# Altium PCB EMG_MainBoard_Layout.PcbDoc (part 5 of 6)
Units mm, origin at the board's own origin, x right, y up, seen from the top; angles counter-clockwise.
Board outline 80 x 45 mm, 4 copper layers (L1 TOP, L2 GND, L3 POWER SIGNAL, L4 BOTTOM GND), stack 1.164 mm thick; 231 components, 136 nets, 808 pads, 288 vias.
Unrouted connection lines stored in the file: 570.
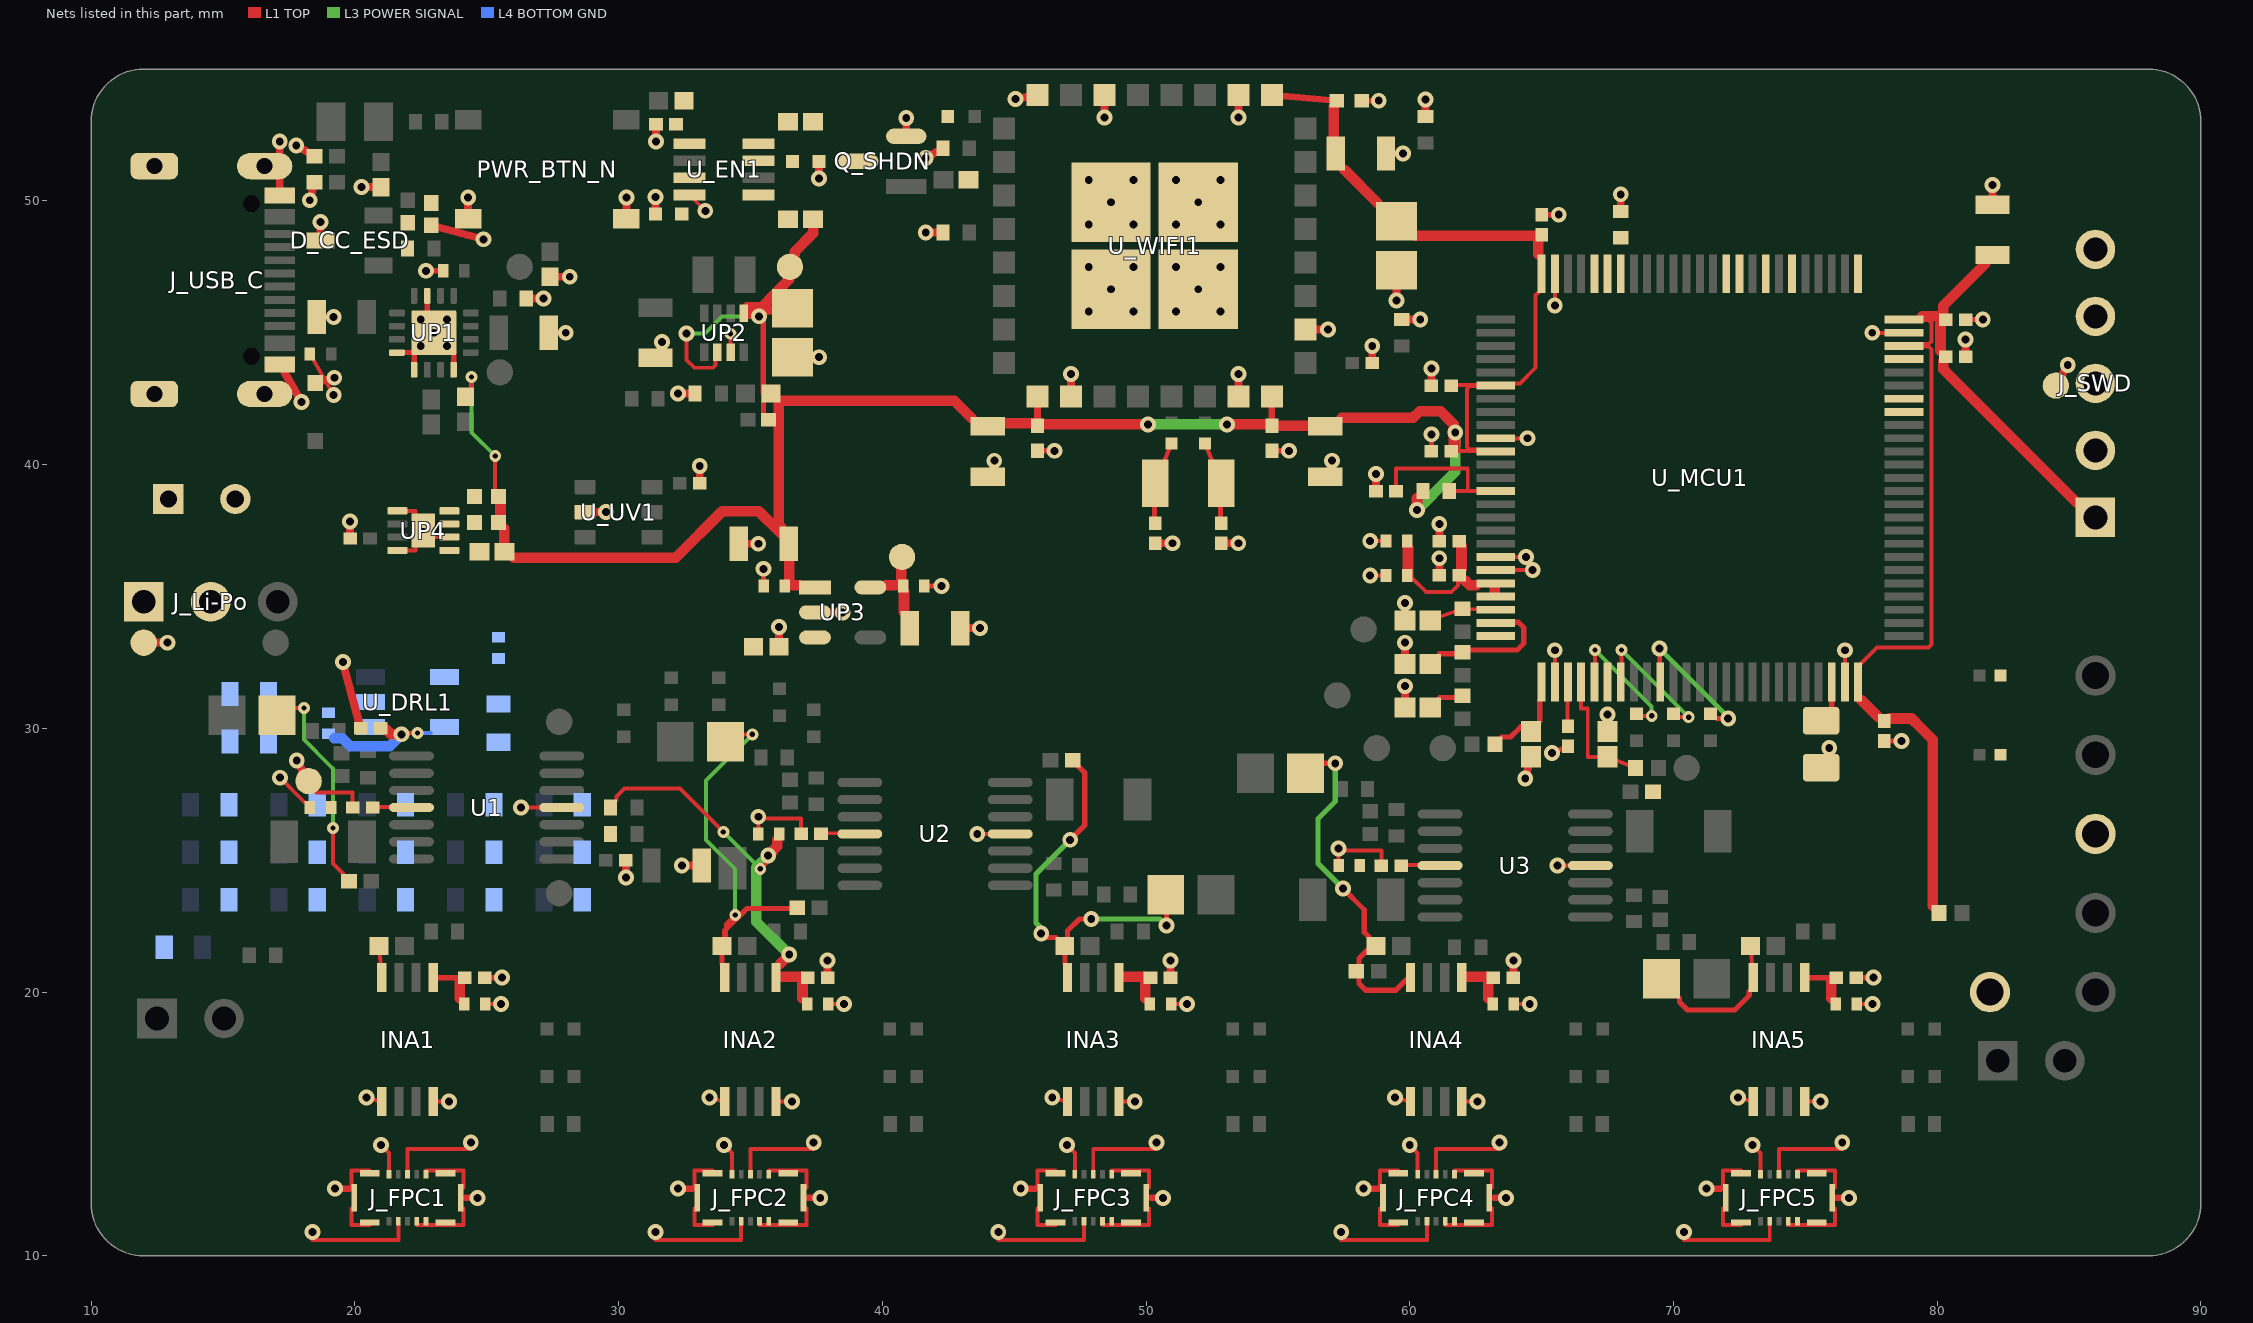
[diagram p5: the nets of this part, all layers, seen from the top]

## Part data (continued)
U2: library part EMG_R5_U2, "None", Case/Package=TSSOP, Input Bias Current=100pA, Input Offset Voltage (Vos)=4.5mV, Max Operating Temperature=125°C, Max Supply Voltage=6V, Min Operating Temperature=-40°C, Min Supply Voltage=1.8V, Nominal Supply Current=45uA, Output Current=15mA, Power Supply Rejection Ratio (PSRR)=63dB, Voltage Gain=110dB, Amplifier Type="GENERAL PURPOSE", Common Mode Rejection Ratio=56dB, Controlled Revision="R5 2026-09-16; project-local frozen symbol/footprint", Gain Bandwidth Product=1MHz, Lead Free="Lead Free", Mount="Surface Mount", Number of Channels=4, Number of Circuits=4, Number of Elements=4, Number of Pins=14, Packaging="Tape and Reel", RoHS Compliant=Yes, Slew Rate=0.5V/µs, Supply Current=45uA, Technology=CMOS, Unity Gain Bandwidth Product=1MHz
U3: library part EMG_R5_U3, "None", Case/Package=TSSOP, Input Bias Current=100pA, Input Offset Voltage (Vos)=4.5mV, Max Operating Temperature=125°C, Max Supply Voltage=6V, Min Operating Temperature=-40°C, Min Supply Voltage=1.8V, Nominal Supply Current=45uA, Output Current=15mA, Power Supply Rejection Ratio (PSRR)=63dB, Voltage Gain=110dB, Amplifier Type="GENERAL PURPOSE", Common Mode Rejection Ratio=56dB, Controlled Revision="R5 2026-09-16; project-local frozen symbol/footprint", Gain Bandwidth Product=1MHz, Lead Free="Lead Free", Mount="Surface Mount", Number of Channels=4, Number of Circuits=4, Number of Elements=4, Number of Pins=14, Packaging="Tape and Reel", RoHS Compliant=Yes, Slew Rate=0.5V/µs, Supply Current=45uA, Technology=CMOS, Unity Gain Bandwidth Product=1MHz
U_DRL1: library part EMG_MCP6401_SOT23_5_DRL, "MCP6401 single operational amplifier, SOT-23-5; optional DRL, DNP", Manufacturer="Microchip Technology", Package="SOT-23-5 / OT", Assembly Variant="PROTO_1_REMOTE_NTC: Not Fitted", Manufacturer Part Number=MCP6401T-E/OT, Population="DNP - optional DRL"
U_EN1: library part EMG_R5_U_EN1, "Pushbutton On / Off  Controller with µP Interrupt, 8-pin SOT23 (TS8-8), -40 to 85 degC, Pb-Free, Mini Tape and Reel", Manufacturer="Linear Technology", Code_JEDEC=MO-193, ComponentLink1Description="Manufacturer URL", ComponentLink1URL=http://www.linear.com/, ComponentLink2Description=Datasheet, ComponentLink2URL=http://cds.linear.com/docs/en/datasheet/2954fb.pdf, ComponentLink3Description="Package Specification", ComponentLink3URL=http://cds.linear.com/docs/en/packaging/SOT_8_05-08-1637.pdf, Controlled Revision="R5 2026-09-16; project-local frozen symbol/footprint", DatasheetVersion="Rev. B", Mounting Technology="Surface Mount", Number of Supplies(#)=1, PackageDescription="8-Pin Plastic TSOT-23, Body 2.9 x 1.63 mm, Pitch 0.65 mm", PackageReference=TS8-8, PackageVersion="Rev. A, 08/2010", Packing="Mini Tape and Reel", PartNumber=LTC2954ITS8-1#TRMPBF, RoHS=TRUE
U_MCU1: library part EMG_R5_U_MCU1, "Integrated Circuit", Manufacturer_Name=STMicroelectronics, Mouser Part Number=511-STM32U575VIT6, Arrow Part Number=STM32U575VIT6, Arrow Price/Stock=https://www.arrow.com/en/products/stm32u575vit6/stmicroelectronics.html?utm_currency=USD&region=nac, Controlled Revision="R5 2026-09-16; project-local frozen symbol/footprint", Datasheet Link=https://www.st.com/resource/en/datasheet/stm32u575ag.pdf, Height=1.6mm, Manufacturer_Part_Number=STM32U575VIT6, Mouser Price/Stock=https://www.mouser.co.uk/ProductDetail/STMicroelectronics/STM32U575VIT6?qs=DRkmTr78QAR9I8TWG1L7Og%3D%3D
U_UV1: library part EMG_R5_U_UV1, "Low Quiescent Current, Programmable-Delay Supervisory Circuit, 1 Supply Monitored, -40 to 125 degC, 6-pin SOT-23 (DBV), Green (RoHS & no Sb/Br)", Manufacturer="Texas Instruments", Rating=Catalog, Threshold Voltage 1 (typ)(Typ)(V)=3.07, # of Supplies Monitored=1, Code_JEDEC=MO-178-AB*, ComponentLink1Description=Datasheet, ComponentLink1URL=http://www.ti.com/general/docs/lit/getliterature.tsp?genericPartNumber=TPS3808G33&fileType=pdf, Controlled Revision="R5 2026-09-16; project-local frozen symbol/footprint", DatasheetVersion=SBVS050J, Iq(Typ)(uA)=2.4, Mounting Technology="Surface Mount", Output Driver Type / Reset Output="Active-low, Open-drain", PackageDescription="6-Pin Plastic Small-Outline Package, 2.9 x 1.6 mm Body, 0.95 mm Pitch, 2.8 mm Lead Span", PackageReference=DBV0006A, PackageVersion="revK, Mar-2006", PartNumber=TPS3808G33DBVR, Reset Threshold Accuracy(%)=0.5, SubFamily="Supervisor and Reset IC", Time Delay(ms)=Programmable, VCC(Max)(V)=6.5, VCC(Min)(V)=1.7
U_WIFI1: library part EMG_R5_U_WIFI1, "Integrated Circuit", Manufacturer_Name=STMicroelectronics, Arrow Part Number=ST67W611M1A6BTR, Arrow Price/Stock=https://www.arrow.com/en/products/st67w611m1a6btr/stmicroelectronics.html?utm_currency=USD&region=nac, Controlled Revision="R5 2026-09-16; project-local frozen symbol/footprint", Datasheet Link=https://www.st.com/resource/en/datasheet/st67w611m1.pdf, Height=2.37mm, Manufacturer_Part_Number=ST67W611M1A6BTR
UP1: library part EMG_R5_UP1, "BQ24072T single-cell Li-ion charger with dynamic power path; OUT tracks battery +225mV with 3.4V minimum regulation under USB power", Manufacturer="Texas Instruments", Over Voltage Protection=N, Code_JEDEC=MO-220, ComponentLink1Description=Datasheet, ComponentLink1URL=http://www.ti.com/general/docs/lit/getliterature.tsp?genericPartNumber=BQ24072T&fileType=pdf, Controlled Revision="R5 2026-09-16; project-local frozen symbol/footprint", DatasheetVersion=SLUS937A, Eco-Plan="Green (RoHS & no Sb/Br)", Lead Acid=N, Li-Ion=Y, Li-Polymer=Y, Manufacturer Part Number=BQ24072TRGTR, Mounting Technology="Surface Mount", NiCd=N, NiMH=N, PackageDescription="16-Pin Plastic Quad Flat No-Lead, 3 x 3 mm Body, 0.5 mm Pitch, 1.7 x 1.7 mm Exposed Pad", PackageReference=RGT0016C, PackageVersion="revH, Oct-2011", PartNumber=BQ24072TRGTR, SubFamily="Battery Charge Management", Vin(Min)(V)=4.3
UP2: library part EMG_R5_UP2, "1.5-A output current, high-power-density buck-boost converter", Package="SOT-583 Texas Instruments", Check_prices=https://www.snapeda.com/parts/TPS631000DRLR/Texas+Instruments/view-part/?ref=eda, Controlled Revision="R5 2026-09-16; project-local frozen symbol/footprint", MF="Texas Instruments", MP=TPS631000DRLR, SnapEDA_Link=https://www.snapeda.com/parts/TPS631000DRLR/Texas+Instruments/view-part/?ref=snap
UP3: library part EMG_R5_UP3, "IC REG LINEAR 3V 300MA SOT23-5", Controlled Revision="R5 2026-09-16; project-local frozen symbol/footprint", RoHS Compliant=Yes
UP4: library part EMG_R5_UP4, "3ÂµA 1-Cell/2-Cell Fuel Gauge with ModelGauge", Package="TDFN-8 Maxim", Availability="In Stock", Check_prices=https://www.snapeda.com/parts/MAX17048G+T10/Analog+Devices/view-part/?ref=eda, Controlled Revision="R5 2026-09-16; project-local frozen symbol/footprint", MF="Analog Devices", MP=MAX17048G+T10, Price=None, Purchase-URL=https://pricing.snapeda.com/search/part/MAX17048G+T10/?ref=eda, SnapEDA_Link=https://www.snapeda.com/parts/MAX17048G+T10/Analog+Devices/view-part/?ref=snap
X_WIFI_32K: library part EMG_R5_X_WIFI_32K, "Epson FC-135 32.768 kHz 9 pF +/-20 ppm, ESR 70 kohm max, 3.2x1.5 mm, 2 terminals", Frequency="32.768 kHz", Load Capacitance="9 pF", Manufacturer="Seiko Epson Corporation", Package="SMD3215 / 3.2 x 1.5 mm / 2 terminal", Temperature Range="-40 to +85 degC", Tolerance="+/-20 ppm at 25 degC, 0.1 uW", Controlled Revision="R5 2026-09-16; project-local frozen symbol/footprint", Datasheet Link=https://download.epsondevice.com/td/pdf/td_xtal_32khz/FC-135_Q13FC13500003_en.pdf, Drive Level="0.1 uW nominal; 0.5 uW maximum", ESR="70 kohm maximum", Height="0.8 +/-0.1 mm", Manufacturer Part Number=Q13FC13500003, Packaging Note="Q13FC13500003xx; xx=00 is 3000/reel"

## Free pads (board coordinates)
  round 1 smd paste-0.5 mask+0.05: TP_3V0_ANA(40.75,36.5) TP_3V3_DIG(36.5,47.5) TP_GND_ANA(18.25,28) TP_GND_DIG(84.5,43) TP_GND_PWR(12,33.25) TP_VBAT_CELL(17,33.25) TP_VBUS(26.25,47.5) TP_VOUT_1(58.25,33.75) TP_VOUT_2(61.25,29.25) TP_VOUT_3(58.75,29.25) TP_VOUT_4(57.25,31.25) TP_VOUT_5(70.5,28.5) TP_VREF_A(27.75,23.75) TP_VREF_B_SRC(27.75,30.25) TP_VSYS(25.5,43.5)

## Via types
v1: diameter 0.6, hole 0.3, L1 TOP to L4 BOTTOM GND, 240 vias
v2: diameter 0.45, hole 0.2, L1 TOP to L4 BOTTOM GND, 31 vias
v3: diameter 0.6, hole 0.3, L1 TOP to L4 BOTTOM GND, tented both sides, 12 vias
v4: diameter 0.5, hole 0.3, L1 TOP to L4 BOTTOM GND, 5 vias

## Nets (pads, with @x,y where several pads share a name; then routed paths per layer and width w, separated by ;. In a path a pad name is that pad's centre, name@x,y a point inside that pad or via, vN(x,y) a via of type N, cw(c..) or ccw(c..) an arc to the next point about the centre after c; other vN are vias at no path point)
3V0_ANA: C1_MCU.1 C2_MCU.2 C3_MCU.1 C4_MCU.2 C_DRL_DEC.1 CCU1.1 CCU2.2 CCU3.2 CCU4.1 CCU5.2 CCU6.1 CCU7.2 CCU8.1 CCU9.2 CCU10.1 Cdiv.2 CU_11.2 CU_12.2 CU_14.2 CU_21.1 CU_22.1 CU_24.1 CUP5_2.2 CUP5_3.2 INA1.5 INA2.5 INA3.5 INA4.5 INA5.5 J_FPC1.P1_1 J_FPC1.P1_2 J_FPC1.P1_3 J_FPC2.P1_1 J_FPC2.P1_2 J_FPC2.P1_3 J_FPC3.P1_1 J_FPC3.P1_2 J_FPC3.P1_3 J_FPC4.P1_1 J_FPC4.P1_2 J_FPC4.P1_3 J_FPC5.P1_1 J_FPC5.P1_2 J_FPC5.P1_3 pad.TP_3V0_ANA RV2.1 U1.4 U2.4 U3.4 U_DRL1.5 U_MCU1.21 U_MCU1.22 UP3.5 | length 53.2
  L1 TOP w0.15: J_FPC1.P1_2@19.88,11.8 19.88,11.17 J_FPC1.P1_3@20.565,11.17 ; J_FPC1.P1_2@19.88,12.6 19.88,13.23 J_FPC1.P1_1@20.565,13.23 ; CU_11.2@20.875,27.025 U1.4@21.325,27.025 ; Cdiv.2@21.175,29.825 v2(22.375,29.825) ; RV2.1@29.925,27.275 29.925,27.425 30.225,27.725 32.325,27.725 v2(33.975,26.075) ; J_FPC2.P1_2@32.88,11.8 32.88,11.17 J_FPC2.P1_3@33.565,11.17 ; J_FPC2.P1_2@32.88,12.6 32.88,13.23 J_FPC2.P1_1@33.565,13.23 ; v2(35.375,24.675) 35.975,25.275 CU_22.1@35.975,25.775 ; CU_12.2@37.875,26.025 U2.4@38.325,26.025 ; J_FPC3.P1_2@45.88,11.8 45.88,11.17 J_FPC3.P1_3@46.565,11.17 ; J_FPC3.P1_2@45.88,12.6 45.88,13.23 J_FPC3.P1_1@46.565,13.23 ; J_FPC4.P1_2@58.88,11.8 58.88,11.17 J_FPC4.P1_3@59.565,11.17 ; J_FPC4.P1_2@58.88,12.6 58.88,13.23 J_FPC4.P1_1@59.565,13.23 ; CU_14.2@59.875,24.825 U3.4@60.325,24.825 ; C2_MCU.2@60.075,36.875 60.075,35.725 60.625,35.175 61.524,35.175 61.575,35.175 61.825,35.425 C1_MCU.1@61.825,36.925 ; J_FPC5.P1_2@71.88,11.8 71.88,11.17 J_FPC5.P1_3@72.565,11.17 ; J_FPC5.P1_2@71.88,12.6 71.88,13.23 J_FPC5.P1_1@72.565,13.23
  L1 TOP w0.2: INA1.5@22.975,20.55 CCU1.1@24.171,20.55 ; INA5.5@74.975,20.55 CCU10.1@76.171,20.55
  L1 TOP w0.25: v1(19.25,12.55) 19.8,12.55 ; v1(32.25,12.55) 32.8,12.55 ; v1(45.25,12.55) 45.8,12.55 ; v1(58.25,12.55) 58.8,12.55 ; v1(71.25,12.55) 71.8,12.55
  L1 TOP w0.4: Cdiv.2@21.175,29.975 21.375,29.775 v1(21.775,29.775) ; CCU2.2@23.975,19.775 CCU1.1@23.975,20.375 ; v1(35.675,25.175) 36.025,25.525 CU_22.1@36.025,25.775 ; INA2.5@36.125,20.575 CCU4.1@36.925,20.575 ; INA2.5@36.125,21.075 v1(36.475,21.425) ; CCU3.2@36.975,19.775 CCU4.1@36.975,20.375 ; UP3.5@40.125,35.425 CUP5_2.2@40.625,35.425 ; CUP5_2.2@40.725,35.625 pad.TP_3V0_ANA@40.725,36.025 ; CUP5_3.2@40.825,34.425 CUP5_2.2@40.825,35.175 ; INA3.5@49.125,20.575 CCU6.1@49.925,20.575 ; CCU5.2@49.975,19.775 CCU6.1@49.975,20.375 ; C4_MCU.2@59.925,36.025 C2_MCU.2@59.925,36.875 ; C3_MCU.1@61.975,36.025 C1_MCU.1@61.975,36.925 ; C3_MCU.1@62.075,35.625 62.275,35.425 U_MCU1.21@62.525,35.425 ; INA4.5@62.125,20.575 CCU8.1@62.925,20.575 ; CCU7.2@62.975,19.775 CCU8.1@62.975,20.375 ; U_MCU1.22@63.225,35.125 U_MCU1.21@63.225,35.375 ; CCU9.2@75.975,19.775 CCU10.1@75.975,20.375
  L3 POWER SIGNAL w0.15: v2(33.975,26.075) v2(35.375,24.675)
  L3 POWER SIGNAL w0.4: v1(35.675,25.175) 35.225,24.725 35.225,22.675 v1(36.475,21.425)
  L4 BOTTOM GND w0.15: v2(22.375,29.825) U_DRL1.5@22.875,29.825
  L4 BOTTOM GND w0.4: C_DRL_DEC.1@19.225,29.625 19.525,29.625 19.825,29.325 20.25,29.325 21.325,29.325 v1(21.775,29.775)
3V3_DIG: C_MCU_BULK.1 C_MCU_VDD1.2 C_MCU_VDD2.2 C_MCU_VDD3.2 C_MCU_VDD4.1 C_MCU_VDD5.1 C_VBAT.2 C_VDDUSB.1 C_WIFI_BULK.2 C_WIFI_VDD33.1 C_WIFI_VDD33_HF.1 C_WIFI_VDDIO1.2 C_WIFI_VDDIO1_HF.1 C_WIFI_VDDIO2.2 C_WIFI_VDDIO2_HF.2 CUP4.1 CUP4_FB.2 CUP5_1.1 CUP5_5.1 J_SWD.1 pad.TP_3V3_DIG R_AL.2 R_INT_PULLUP.1 R_KILL_PU.2 R_NRST.2 R_PGOOD.2 R_SCL.2 R_SDA.2 R_WIFI_BOOT_OVR.1 RUP_3.2 U_MCU1.6 U_MCU1.11 U_MCU1.28 U_MCU1.50 U_MCU1.73 U_MCU1.75 U_MCU1.100 U_WIFI1.9 U_WIFI1.16 U_WIFI1.25 UP2.1 UP2.6 UP3.1 | length 131.4
  L1 TOP w0.15: R_PGOOD.2@24.425,42.925 v2(24.425,43.325) ; R_SDA.2@25.325,39.075 v2(25.325,40.325) ; v1(32.575,44.975) 32.575,43.975 32.875,43.675 33.575,43.675 33.675,43.775 UP2.6@33.675,43.975 ; UP2.1@34.875,45.625 v1(35.325,45.625) ; C_MCU_VDD1.2@61.775,40.525 U_MCU1.11@62.525,40.525 ; C_VBAT.2@61.775,43.025 U_MCU1.6@62.525,43.025 ; U_MCU1.11@62.525,40.575 62.275,40.575 62.175,40.675 62.175,42.875 62.275,42.975 U_MCU1.6@62.525,42.975 ; U_MCU1.6@63.975,43.075 64.175,43.075 64.775,43.675 64.775,46.425 U_MCU1.100@64.875,46.525 ; C_MCU_VDD2.2@65.975,30.325 U_MCU1.28@65.975,31.075 ; U_MCU1.50@77.125,32.475 77.725,33.075 79.675,33.075 79.775,33.175 79.775,44.375 79.675,44.475 U_MCU1.73@79.425,44.475 ; U_MCU1.73@79.425,44.575 79.675,44.575 79.775,44.675 79.775,45.375 79.675,45.475 U_MCU1.75@79.425,45.475
  L1 TOP w0.2: CUP4_FB.2@35.69,41.7 35.495,41.7 35.495,45.926 CUP4.1@36.6,45.926 35.489,45.926 35.489,42.7 RUP_3.2@35.779,42.7
  L1 TOP w0.25: C_WIFI_VDDIO1_HF.1@45.885,41.475 U_WIFI1.9@45.885,42.584 ; C_WIFI_VDD33_HF.1@54.775,41.475 U_WIFI1.16@54.775,42.584 ; U_WIFI1.25@54.775,54.016 C_WIFI_VDDIO2_HF.2@57.225,53.8
  L1 TOP w0.3: UP2.1@34.75,45.735 CUP4.1@36.6,45.926
  L1 TOP w0.4: R_SCL.2@25.525,38.075 R_SDA.2@25.525,38.575 ; R_AL.2@25.675,37.025 R_SCL.2@25.675,37.575 ; R_AL.2@26.025,36.475 32.175,36.475 33.925,38.225 35.325,38.225 CUP5_5.1@36.125,37.425 ; UP2.1@34.875,45.975 35.425,45.975 35.91,46.46 pad.TP_3V3_DIG@36.475,47.025 ; CUP5_5.1@36.175,37.625 36.075,37.725 36.075,42.425 42.725,42.425 C_WIFI_VDDIO1.2@43.375,41.775 ; CUP5_1.1@36.475,35.425 UP3.1@36.875,35.425 ; CUP5_1.1@36.475,35.625 CUP5_5.1@36.475,36.375 ; 36.675,47.975 36.675,48.075 37.375,48.775 R_INT_PULLUP.1@37.375,49.025 ; C_WIFI_VDDIO1.2@44.625,41.575 C_WIFI_VDDIO1_HF.1@45.675,41.575 ; C_WIFI_VDDIO1_HF.1@46.075,41.525 v1(50.075,41.525) ; v1(53.075,41.525) 54.525,41.525 ; C_WIFI_VDD33_HF.1@54.975,41.475 C_WIFI_VDD33.1@56.175,41.475 ; C_WIFI_VDDIO2.2@57.125,52.425 C_WIFI_VDDIO2_HF.2@57.125,53.575 ; C_WIFI_VDD33.1@57.425,41.775 60.125,41.775 60.375,42.025 61.175,42.025 61.524,41.675 61.675,41.525 C_MCU_VDD1.2@61.675,40.725 ; C_WIFI_VDDIO2.2@57.525,51.175 C_WIFI_BULK.2@58.775,49.925 ; C_WIFI_BULK.2@60.225,48.675 61.524,48.675 C_MCU_VDD5.1@64.775,48.675 ; v1(60.275,38.275) R_NRST.2@60.275,38.725 ; C_MCU_VDD1.2@61.725,40.725 v1(61.725,41.225) ; U_MCU1.100@64.875,47.975 C_MCU_VDD5.1@64.875,48.525 ; U_MCU1.50@77.125,31.075 C_MCU_VDD3.2@77.775,30.425 ; C_MCU_VDD3.2@78.175,30.375 79.025,30.375 79.376,30.024 79.825,29.575 R_WIFI_BOOT_OVR.1@79.825,23.275 ; U_MCU1.75@79.425,45.625 C_MCU_VDD4.1@80.075,45.625 ; C_VDDUSB.1@80.125,44.325 C_MCU_VDD4.1@80.125,45.325 ; C_VDDUSB.1@80.225,43.925 80.225,43.625 80.476,43.375 J_SWD.1@85.275,38.575 ; C_MCU_VDD4.1@80.225,45.725 80.225,46.025 80.476,46.276 C_MCU_BULK.1@81.825,47.625
  L3 POWER SIGNAL w0.15: v2(24.425,43.325) 24.425,42.3 24.425,41.225 v2(25.325,40.325) ; v1(32.575,44.975) 33.275,44.975 33.925,45.625 v1(35.325,45.625)
  L3 POWER SIGNAL w0.4: v1(50.075,41.525) v1(53.075,41.525) ; v1(60.275,38.275) 61.524,39.525 61.725,39.725 v1(61.725,41.225)
ADC_EMG1: C_ADC1.1 R_ADC1.2 U_MCU1.23 | length 2.6
  L1 TOP w0.15: C_ADC1.1@60.777,34.1 R_ADC1.2@62,34.535 U_MCU1.23@63.262,34.5
ADC_EMG2: C_ADC2.1 R_ADC2.2 U_MCU1.24 | length 3.8
  L1 TOP w0.2: C_ADC2.1@61.125,32.825 61.524,32.825 R_ADC2.2@61.725,32.825 ; R_ADC2.2@62.275,32.975 64.075,32.975 64.325,33.225 64.325,33.825 64.125,34.025 U_MCU1.24@63.975,34.025
ADC_EMG3: C_ADC3.1 R_ADC3.2 U_MCU1.25 | length 0.6
  L1 TOP w0.2: C_ADC3.1@61.125,31.175 61.524,31.175 R_ADC3.2@61.725,31.175
ADC_EMG4: C_ADC4.1 R_ADC4.2 U_MCU1.26 | length 1.7
  L1 TOP w0.2: R_ADC4.2@63.475,29.675 63.825,29.675 64.174,30.024 C_ADC4.1@64.225,30.075 ; C_ADC4.1@64.925,30.275 U_MCU1.26@64.925,31.075
ADC_EMG5: C_ADC5.1 R_ADC5.2 U_MCU1.29 | length 6.1
  L1 TOP w0.15: U_MCU1.29@66.5,31.762 66.5,30.75 66.75,30.75 66.75,28.923 C_ADC5.1@67.5,28.923 ; C_ADC5.1@67.5,28.923 R_ADC5.2@68.565,28.5 C_ADC5.1@67.5,28.923
AFE_EN: R_EN_PD.1 U_MCU1.85 UP3.3
BAT_TEMP: J_Li-Po.2 R_TH_BAT.2 R_TS_BOTTOM.2 R_TS_SER.1 R_TS_TOP.1
DRL_AMP_OUT: C_DRL_FB.2 R_DRL_FB.2 R_DRL_OUT1.1 U_DRL1.1
DRL_LIMIT_MID: R_DRL_OUT1.2 R_DRL_OUT2.1
DRL_LIMITED: R_DRL_OUT2.2 R_DRL_SEL.1
DRL_SUM: C_DRL_FB.1 R_DRL_FB.1 R_DRL_VA1.2 R_DRL_VA2.2 R_DRL_VA3.2 R_DRL_VA4.2 R_DRL_VA5.2 R_DRL_VB1.2 R_DRL_VB2.2 R_DRL_VB3.2 R_DRL_VB4.2 R_DRL_VB5.2 R_DRL_VC1.2 R_DRL_VC2.2 R_DRL_VC3.2 R_DRL_VC4.2 R_DRL_VC5.2 U_DRL1.4
FG_ALRT: R_AL.1 U_MCU1.81 UP4.5
GND: C1_EN1.1 C1_MCU.2 C2_EN1.2 C2_MCU.1 C3_EN1.1 C3_MCU.2 C4_MCU.1 C_ADC1.2 C_ADC2.2 C_ADC3.2 C_ADC4.2 C_ADC5.2 C_BAT.2 C_DRL_DEC.2 C_IN_.2 C_MCU_BULK.2 C_MCU_VDD1.1 C_MCU_VDD2.1 C_MCU_VDD3.1 C_MCU_VDD4.2 C_MCU_VDD5.2 C_NRST.2 C_OUT_.2 C_UV_BYPASS.2 C_VBAT.1 C_VBUS.1 C_VDDUSB.2 C_WIFI_BULK.1 C_WIFI_EN.2 C_WIFI_VDD33.2 C_WIFI_VDD33_HF.2 C_WIFI_VDDIO1.1 C_WIFI_VDDIO1_HF.2 C_WIFI_VDDIO2.1 C_WIFI_VDDIO2_HF.1 C_WIFI_X32_IN.1 C_WIFI_X32_OUT.1 CCU1.2 CCU2.1 CCU3.1 CCU4.2 CCU5.1 CCU6.2 CCU7.1 CCU8.2 CCU9.1 CCU10.2 Cdiv.1 Cdiv_1.1 Cdiv_10uF.1 CU6_1.1 CU_11.1 CU_12.1 CU_14.1 CU_21.2 CU_22.2 CU_24.2 CUP4.2 CUP4_1.2 CUP5_1.2 CUP5_2.1 CUP5_3.1 CUP5_5.2 D_CC_ESD.3 D_VBUS.2 INA1.1 INA1.4 INA2.1 INA2.4 INA3.1 INA3.4 INA4.1 INA4.4 INA5.1 INA5.4 J_FPC1.1 J_FPC1.3 J_FPC1.5 J_FPC1.7 J_FPC1.9 J_FPC1.10 J_FPC1.P2_1 J_FPC1.P2_2 J_FPC1.P2_3 J_FPC2.1 J_FPC2.3 J_FPC2.5 J_FPC2.7 J_FPC2.9 J_FPC2.10 J_FPC2.P2_1 J_FPC2.P2_2 J_FPC2.P2_3 J_FPC3.1 J_FPC3.3 J_FPC3.5 J_FPC3.7 J_FPC3.9 J_FPC3.10 J_FPC3.P2_1 J_FPC3.P2_2 J_FPC3.P2_3 J_FPC4.1 J_FPC4.3 J_FPC4.5 J_FPC4.7 J_FPC4.9 J_FPC4.10 J_FPC4.P2_1 J_FPC4.P2_2 J_FPC4.P2_3 J_FPC5.1 J_FPC5.3 J_FPC5.5 J_FPC5.7 J_FPC5.9 J_FPC5.10 J_FPC5.P2_1 J_FPC5.P2_2 J_FPC5.P2_3 J_Li-Po.1 J_SWD.3 J_USB_C.A1_B12 J_USB_C.B1_A12 J_USB_C.SH1 J_USB_C.SH2 J_USB_C.SH3 J_USB_C.SH4 MCU_VCAP.1 pad.TP_GND_ANA pad.TP_GND_DIG pad.TP_GND_PWR PWR_BTN_N.C PWR_BTN_N.D Q_SHDN.2 R_EN_PD.2 R_LIM.1 R_MCU_BOOT0_PD.1 R_SHDN_PD.1 R_TH_BAT.1 R_TMR.1 R_TS_BOTTOM.1 R_WIFI_BOOT_PD.1 R_WIFI_CS_PD.2 R_WIFI_EN_PD.2 RISET.2 RJ1.1 RJ2.1 RUP_4.1 RV1.2 TP_GND.TP U1.11 U2.11 U3.11 U_DRL1.2 U_EN1.4 U_MCU1.10 U_MCU1.19 U_MCU1.20 U_MCU1.27 U_MCU1.49 U_MCU1.74 U_MCU1.99 U_UV1.2 U_WIFI1.10 U_WIFI1.15 U_WIFI1.18 U_WIFI1.26 U_WIFI1.30 U_WIFI1.32 U_WIFI1.33 U_WIFI1.34 U_WIFI1.35 U_WIFI1.36 UP1.4 UP1.5 UP1.8 UP1.15 UP1.17@23,45 UP2.7 UP3.2 UP4.1 UP4.4 UP4.6 UP4.9 | length 141.9
  L1 TOP w0.15: v1(17.169,28.131) 18.1,27.2 ; v1(18.4,10.9) 18.4,10.6 21.65,10.6 J_FPC1.7@21.65,11.17 ; C_VBUS.1@18.444,43.95 v1(19.2,42.641) ; 18.55,27.576 19.921,27.576 CU_11.1@19.921,27 ; v1(20.445,16.005) 20.85,15.897 ; v1(21,14.2) 21.3,13.9 J_FPC1.1@21.3,13.23 ; UP4.4@21.615,36.75 22.3,36.75 UP4.9@22.3,36.97 ; UP4.1@21.615,38.25 22.3,38.25 UP4.9@22.3,38.03 ; J_FPC1.3@22,13.23 22,14.05 24.4,14.05 v1(24.4,14.3) ; J_FPC1.9@22.35,11.17 23.435,11.17 24.12,11.17 J_FPC1.P2_2@24.12,11.8 ; J_FPC1.5@22.7,13.23 23.435,13.23 24.12,13.23 J_FPC1.P2_2@24.12,12.6 ; UP4.9@22.9,37.25 UP4.6@23.585,37.25 ; 23.15,15.85 v1(23.575,15.85) ; 25.15,19.55 v1(25.55,19.55) ; v1(26.3,27) 27,27 ; v1(31.4,10.9) 31.4,10.6 34.65,10.6 J_FPC2.7@34.65,11.17 ; U_EN1.4@32.89,50.025 v1(33.291,49.624) ; v1(33.445,16.005) 33.85,15.897 ; v1(34,14.2) 34.3,13.9 J_FPC2.1@34.3,13.23 ; 34.25,44.595 v2(34.25,44.965) ; J_FPC2.3@35,13.23 35,14.05 37.4,14.05 v1(37.4,14.3) ; CU_22.2@35.3,26 35.3,26.576 36.921,26.576 CU_12.1@36.921,26 ; 35.3,26.25 v1(35.3,26.65) ; J_FPC2.9@35.35,11.17 36.435,11.17 37.12,11.17 J_FPC2.P2_2@37.12,11.8 ; J_FPC2.5@35.7,13.23 36.435,13.23 37.12,13.23 J_FPC2.P2_2@37.12,12.6 ; 36.15,15.85 v1(36.575,15.85) ; 38.15,19.55 v1(38.55,19.55) ; v1(43.6,26) U2.11@44,26 ; v1(44.4,10.9) 44.4,10.6 47.65,10.6 J_FPC3.7@47.65,11.17 ; v1(46.445,16.005) 46.85,15.897 ; v1(47,14.2) 47.3,13.9 J_FPC3.1@47.3,13.23 ; J_FPC3.3@48,13.23 48,14.05 50.4,14.05 v1(50.4,14.3) ; J_FPC3.9@48.35,11.17 49.435,11.17 50.12,11.17 J_FPC3.P2_2@50.12,11.8 ; J_FPC3.5@48.7,13.23 49.435,13.23 50.12,13.23 J_FPC3.P2_2@50.12,12.6 ; 49.15,15.85 v1(49.575,15.85) ; 51.15,19.55 v1(51.55,19.55) ; CU_24.2@57.3,24.8 57.3,25.376 58.921,25.376 CU_14.1@58.921,24.8 ; 57.3,25.05 v1(57.3,25.45) ; v1(57.4,10.9) 57.4,10.6 60.65,10.6 J_FPC4.7@60.65,11.17 ; v1(58.5,35.8) 58.9,35.8 ; v1(58.5,37.1) 58.9,37.1 ; v1(59.445,16.005) 59.85,15.897 ; v1(60,14.2) 60.3,13.9 J_FPC4.1@60.3,13.23 ; J_FPC4.3@61,13.23 61,14.05 63.4,14.05 v1(63.4,14.3) ; J_FPC4.9@61.35,11.17 62.435,11.17 63.12,11.17 J_FPC4.P2_2@63.12,11.8 ; J_FPC4.5@61.7,13.23 62.435,13.23 63.12,13.23 J_FPC4.P2_2@63.12,12.6 ; 62.15,15.85 v1(62.575,15.85) ; 64,36 v1(64.662,36) ; 64,36.5 v1(64.412,36.5) ; 64,41 v1(64.462,41) ; 64.15,19.55 v1(64.55,19.55) ; 65.5,32.5 v1(65.5,32.962) ; v1(65.5,46.038) 65.5,46.5 ; v1(65.6,24.8) U3.11@66,24.8 ; v1(70.4,10.9) 70.4,10.6 73.65,10.6 J_FPC5.7@73.65,11.17 ; v1(72.445,16.005) 72.85,15.897 ; v1(73,14.2) 73.3,13.9 J_FPC5.1@73.3,13.23 ; J_FPC5.3@74,13.23 74,14.05 76.4,14.05 v1(76.4,14.3) ; J_FPC5.9@74.35,11.17 75.435,11.17 76.12,11.17 J_FPC5.P2_2@76.12,11.8 ; J_FPC5.5@74.7,13.23 75.435,13.23 76.12,13.23 J_FPC5.P2_2@76.12,12.6 ; 75.15,15.85 v1(75.575,15.85) ; 76.5,32.5 v1(76.5,32.962) ; 77.15,19.55 v1(77.55,19.55) ; v1(77.538,45) 78,45
  L1 TOP w0.2: C_BAT.2@18.55,45.6 v1(19.2,45.6) ; UP1.4@21.6,44.25 22.3,44.25 UP1.17@22.3,44.27 ; UP1.5@22.25,43.6 22.25,44.3 UP1.17@22.27,44.3 ; v3(22.7,47.35) C_IN_.2@23.35,47.35 ; UP1.17@22.75,45.7 UP1.15@22.75,46.4 ; UP1.17@23.73,44.3 23.75,44.3 UP1.8@23.75,43.6 ; CCU1.2@24.929,20.55 v3(25.579,20.55) ; C_OUT_.2@27.35,45 v1(28,45) ; CUP4_1.2@31.4,44.05 v1(31.649,44.651) ; CUP5_1.2@35.5,35.4 v1(35.5,36.05) ; CUP4.2@36.6,44.074 v1(37.6,44.074) ; CUP5_2.1@41.6,35.4 v3(42.25,35.4) ; C_WIFI_VDDIO1.1@44,39.55 v1(44.249,40.151) ; C_WIFI_VDDIO1_HF.2@45.885,40.525 v3(46.535,40.525) ; C_WIFI_VDD33_HF.2@54.775,40.525 v3(55.425,40.525) ; C_WIFI_VDD33.2@56.8,39.55 v1(57.049,40.151) ; C_WIFI_VDDIO2_HF.1@58.175,53.8 v3(58.825,53.8) ; C_WIFI_VDDIO2.1@59.1,51.8 v1(59.75,51.8) ; C_ADC1.2@59.823,34.1 v1(59.823,34.75) ; C_MCU_VDD1.1@60.821,40.5 v3(60.821,41.15) ; C_MCU_VDD5.2@65,49.479 v3(65.65,49.479) ; v3(65.399,29.073) C_MCU_VDD2.1@66,29.321 ; C_ADC5.2@67.5,29.877 v1(67.5,30.527) ; MCU_VCAP.1@75.6,28.512 v1(75.906,29.251) ; CCU10.2@76.929,20.55 v3(77.579,20.55) ; C_MCU_VDD3.1@78,29.521 v3(78.65,29.521) ; C_MCU_VDD4.2@81.079,45.5 v3(81.729,45.5)
  L1 TOP w0.25: 24.2,12.2 v1(24.65,12.2) ; 37.2,12.2 v1(37.65,12.2) ; 50.2,12.2 v1(50.65,12.2) ; 63.2,12.2 v1(63.65,12.2) ; 76.2,12.2 v1(76.65,12.2)
  L1 TOP w0.3: 12.5,33.25 v1(12.9,33.25) ; 17.155,50.5 v1(17.155,52.25) ; J_USB_C.B1_A12@17.328,43.5 v1(17.98,42.371) ; v1(17.782,52.1) RJ2.1@18.175,51.873 ; v1(17.8,28.779) pad.TP_GND_ANA@18,28.433 ; v1(18.294,50.024) 18.401,50.425 ; 18.7,48.8 v1(18.7,49.2) ; 18.8,43.18 v1(19.224,43.294) ; v1(19.549,32.511) Cdiv.1@20.158,30.236 ; 19.821,37.436 v1(19.821,37.85) ; v1(20.25,50.525) RISET.2@20.675,50.525 ; 23.175,49.001 v1(24.88,48.544) ; 24.3,49.7 v1(24.3,50.125) ; 26.75,46.3 v1(27.15,46.3) ; R_TMR.1@27.725,47.125 v1(28.15,47.125) ; U_UV1.2@29.125,38.2 v1(29.525,38.2) ; v1(30.279,24.35) Cdiv_1.1@30.279,24.764 ; 30.3,49.7 v1(30.3,50.125) ; 31.4,49.75 v1(31.4,50.15) ; v1(31.421,52.25) C1_EN1.1@31.421,52.664 ; v1(32.25,42.7) RUP_4.1@32.65,42.7 ; v1(32.4,24.8) Cdiv_10uF.1@32.8,24.8 ; C_UV_BYPASS.2@33.079,39.536 v1(33.079,39.95) ; CUP5_5.2@34.9,37 v1(35.3,37) ; 36.079,33.436 v1(36.079,33.85) ; v1(37.6,50.85) 37.6,51.25 ; CCU4.2@37.929,20.786 v1(37.929,21.2) ; UP3.2@38.052,34.4 v1(38.499,34.4) ; 40.91,52.739 v1(40.91,53.15) ; v1(41.65,48.8) 42.05,48.8 ; v1(41.651,51.625) 42.05,51.856 ; CUP5_3.1@43.3,33.8 v1(43.7,33.8) ; v1(45.048,53.868) U_WIFI1.32@45.461,53.941 ; 47.155,43.008 v1(47.155,43.434) ; v1(48.425,53.166) 48.425,53.592 ; C_WIFI_X32_OUT.1@50.586,37.021 v1(51,37.021) ; CCU6.2@50.929,20.786 v1(50.929,21.2) ; C_WIFI_X32_IN.1@53.086,37.021 v1(53.5,37.021) ; 53.505,43.008 v1(53.505,43.434) ; v1(53.505,53.166) 53.505,53.592 ; 56.47,45.125 v1(56.896,45.125) ; C_WIFI_EN.2@58.579,44.091 v1(58.579,44.505) ; C_NRST.2@58.721,39.236 v1(58.721,39.65) ; v1(59.5,46.224) 59.5,46.647 ; C_ADC3.2@59.823,31.179 v1(59.823,31.6) ; C_ADC2.2@59.823,32.829 v1(59.823,33.25) ; R_WIFI_EN_PD.2@60,45.5 v1(60.4,45.5) ; 60.6,53.45 v1(60.6,53.85) ; C_VBAT.1@60.821,43.236 v1(60.821,43.65) ; C3_MCU.2@61.121,36.036 v1(61.121,36.45) ; C1_MCU.2@61.121,37.336 v1(61.121,37.75) ; CCU8.2@63.929,20.786 v1(63.929,21.2) ; v1(64.38,28.102) 64.492,28.521 ; 68,49.85 v1(68,50.25) ; C_VDDUSB.2@81.079,44.336 v1(81.079,44.75) ; C_MCU_BULK.2@82.1,50.2 v1(82.1,50.6) ; pad.TP_GND_DIG@84.75,43.433 v1(84.95,43.779)
  other v1: 47.83,45.8 49.53,45.8 51.13,45.8 52.83,45.8 48.68,46.65 51.98,46.65 47.83,47.5 49.53,47.5 51.13,47.5 52.83,47.5 47.83,49.1 49.53,49.1 51.13,49.1 52.83,49.1 48.68,49.95 51.98,49.95 47.83,50.8 49.53,50.8 51.13,50.8 52.83,50.8
  other v2: 22.6,37.5
  other v4: 22.5,44.5 23.5,44.5 23,45 22.5,45.5 23.5,45.5
I2C_SCL: R_SCL.1 U_MCU1.95 UP4.7
I2C_SDA: R_SDA.1 U_MCU1.96 UP4.8
INA_OUT_1: CL_1.2 INA1.8 RH_1.1 Rservo_1.2 | length 8.5
  L1 TOP w0.15: CL_1.2@17.725,30.775 17.75,30.775 v2(18.075,30.775) ; v2(19.175,26.225) 19.175,24.875 19.575,24.475 ; RH_1.1@20.921,21.75 INA1.8@21.025,20.55
  L3 POWER SIGNAL w0.15: v2(18.075,30.775) 18.075,29.575 19.05,28.6 19.175,28.475 v2(19.175,26.225)
INA_OUT_2: CL_2.2 INA2.8 RH_2.1 Rservo_2.2 | length 12.8
  L1 TOP w0.15: RH_2.1@34.075,22.075 34.075,22.575 v2(34.425,22.925) ; CL_2.2@34.725,29.775 v2(35.075,29.775)
  L1 TOP w0.2: INA2.8@33.925,21.075 RH_2.1@33.925,21.475 ; RH_2.1@34.025,22.075 34.025,22.325 34.875,23.175 Rservo_2.2@36.475,23.175
  L3 POWER SIGNAL w0.15: v2(34.425,22.925) 34.425,24.675 33.325,25.775 33.325,28.025 v2(35.075,29.775)
INA_OUT_3: CL_3.2 INA3.8 RH_3.1 Rservo_3.2 | length 13.1
  L1 TOP w0.2: v1(46.025,22.225) 46.175,22.075 RH_3.1@46.575,22.075 ; INA3.8@46.925,21.075 RH_3.1@46.925,21.475 ; RH_3.1@47.025,22.075 47.025,22.325 47.475,22.775 v1(47.925,22.775) ; v1(47.125,25.775) 47.675,26.325 47.675,28.325 Rservo_3.2@47.425,28.575 ; v1(50.775,22.525) CL_3.2@50.775,22.975
  L3 POWER SIGNAL w0.2: v1(46.025,22.225) 46.025,22.425 45.825,22.625 45.825,24.475 v1(47.125,25.775) ; v1(47.925,22.775) 50.525,22.775 v1(50.775,22.525)
INA_OUT_4: CL_4.2 INA4.8 RH_4.1 Rservo_4.2 | length 11.1
  L1 TOP w0.2: CL_4.2@56.725,28.675 v1(57.175,28.675) ; v1(57.475,23.925) 58.275,23.125 58.275,22.275 RH_4.1@58.475,22.075 ; Rservo_4.2@58.075,20.575 58.075,20.325 58.325,20.075 59.475,20.075 INA4.8@59.875,20.475 ; 58.075,21.075 58.075,21.275 RH_4.1@58.375,21.575
  L3 POWER SIGNAL w0.2: v1(57.175,28.675) 57.175,27.225 56.525,26.575 56.525,24.875 v1(57.475,23.925)
INA_OUT_5: CL_5.2 INA5.8 RH_5.1 Rservo_5.2 | length 4.5
  L1 TOP w0.15: RH_5.1@72.921,21.75 INA5.8@73.025,20.55
  L1 TOP w0.2: CL_5.2@70.225,19.775 70.225,19.625 70.525,19.325 72.325,19.325 72.875,19.875 INA5.8@72.875,20.025
KILL_CTRL: Q_SHDN.3 R_KILL_PU.1 U_EN1.8
MCU_BOOT0: R_MCU_BOOT0_PD.2 TP_MCU_BOOT0.TP U_MCU1.94
MCU_NRST: C_NRST.1 J_SWD.5 R_NRST.1 U_MCU1.14 | length 7.2
  L1 TOP w0.15: C_NRST.1@59.479,39 59.479,39.85 62.2,39.85 62.2,39 U_MCU1.14@63.262,39 R_NRST.1@61.5,39
MCU_PWR_INT_N: R_INT_PULLUP.2 U_EN1.5 U_MCU1.83
MCU_SHUTDOWN: R_SHDN_G.2 U_MCU1.86
MCU_SPI_MISO: R_SPI_MISO.2 U_MCU1.31
MCU_SPI_MOSI: R_SPI_MOSI.2 U_MCU1.32 | length 4.5
  L1 TOP w0.15: U_MCU1.32@68.025,32.475 v2(68.025,32.975) ; R_SPI_MOSI.2@70.225,30.425 v2(70.575,30.425)
  L3 POWER SIGNAL w0.15: v2(68.025,32.975) v2(70.575,30.425)
MCU_SPI_SCK: R_SPI_SCK.2 U_MCU1.30 | length 4.2
  L1 TOP w0.15: U_MCU1.30@67.025,32.475 v2(67.025,32.975) ; R_SPI_SCK.2@68.825,30.475 v2(69.175,30.475)
  L3 POWER SIGNAL w0.15: v2(67.025,32.975) 69.175,30.825 v2(69.175,30.475)
MCU_SWCLK: J_SWD.4 U_MCU1.76
MCU_SWDIO: J_SWD.2 U_MCU1.72
MCU_VCAP: MCU_VCAP.2 U_MCU1.48 | length 1.6
  L1 TOP w0.2: MCU_VCAP.2@75.6,30.288 76,30.688 U_MCU1.48@76,31.762
MCU_WIFI_CS: R_SPI_CS.2 U_MCU1.35 | length 4.7
  L1 TOP w0.18: U_MCU1.35@69.475,32.475 v1(69.475,33.025) ; R_SPI_CS.2@71.625,30.375 v1(72.075,30.375)
  L3 POWER SIGNAL w0.18: v1(69.475,33.025) 72.075,30.425 v1(72.075,30.375)
MCU_WIFI_UART_RX: R_WIFI_UART_RX_LINK.2 U_MCU1.69
MCU_WIFI_UART_TX: R_WIFI_UART_TX_LINK.2 U_MCU1.68
NetC1_EN1_2: C1_EN1.2 R_EN1_1.2 U_EN1.1
NetC2_EN1_1: C2_EN1.1 U_EN1.3
NetC3_EN1_2: C3_EN1.2 U_EN1.7
NetC_WIFI_X32_IN_2: C_WIFI_X32_IN.2 R_WIFI_X32_IN.1 X_WIFI_32K.1 | length 2
  L1 TOP w0.15: R_WIFI_X32_IN.1@52.235,40.8 X_WIFI_32K.1@52.85,39.3
  L1 TOP w0.2: C_WIFI_X32_IN.2@52.825,38.025 X_WIFI_32K.1@52.825,38.425
NetC_WIFI_X32_OUT_2: C_WIFI_X32_OUT.2 R_WIFI_X32_OUT.1 X_WIFI_32K.2 | length 2
  L1 TOP w0.15: X_WIFI_32K.2@50.35,39.3 R_WIFI_X32_OUT.1@50.965,40.8
  L1 TOP w0.2: C_WIFI_X32_OUT.2@50.325,38.025 X_WIFI_32K.2@50.325,38.425